# Altium PCB Расположение компонентов.PcbDoc
Units mm, origin at the board's own origin, x right, y up, seen from the top; angles counter-clockwise.
Board outline 152.4 x 101.6 mm, 2 copper layers (Top Layer, Bottom Layer); 8 components, 0 nets, 68 pads, 0 vias.
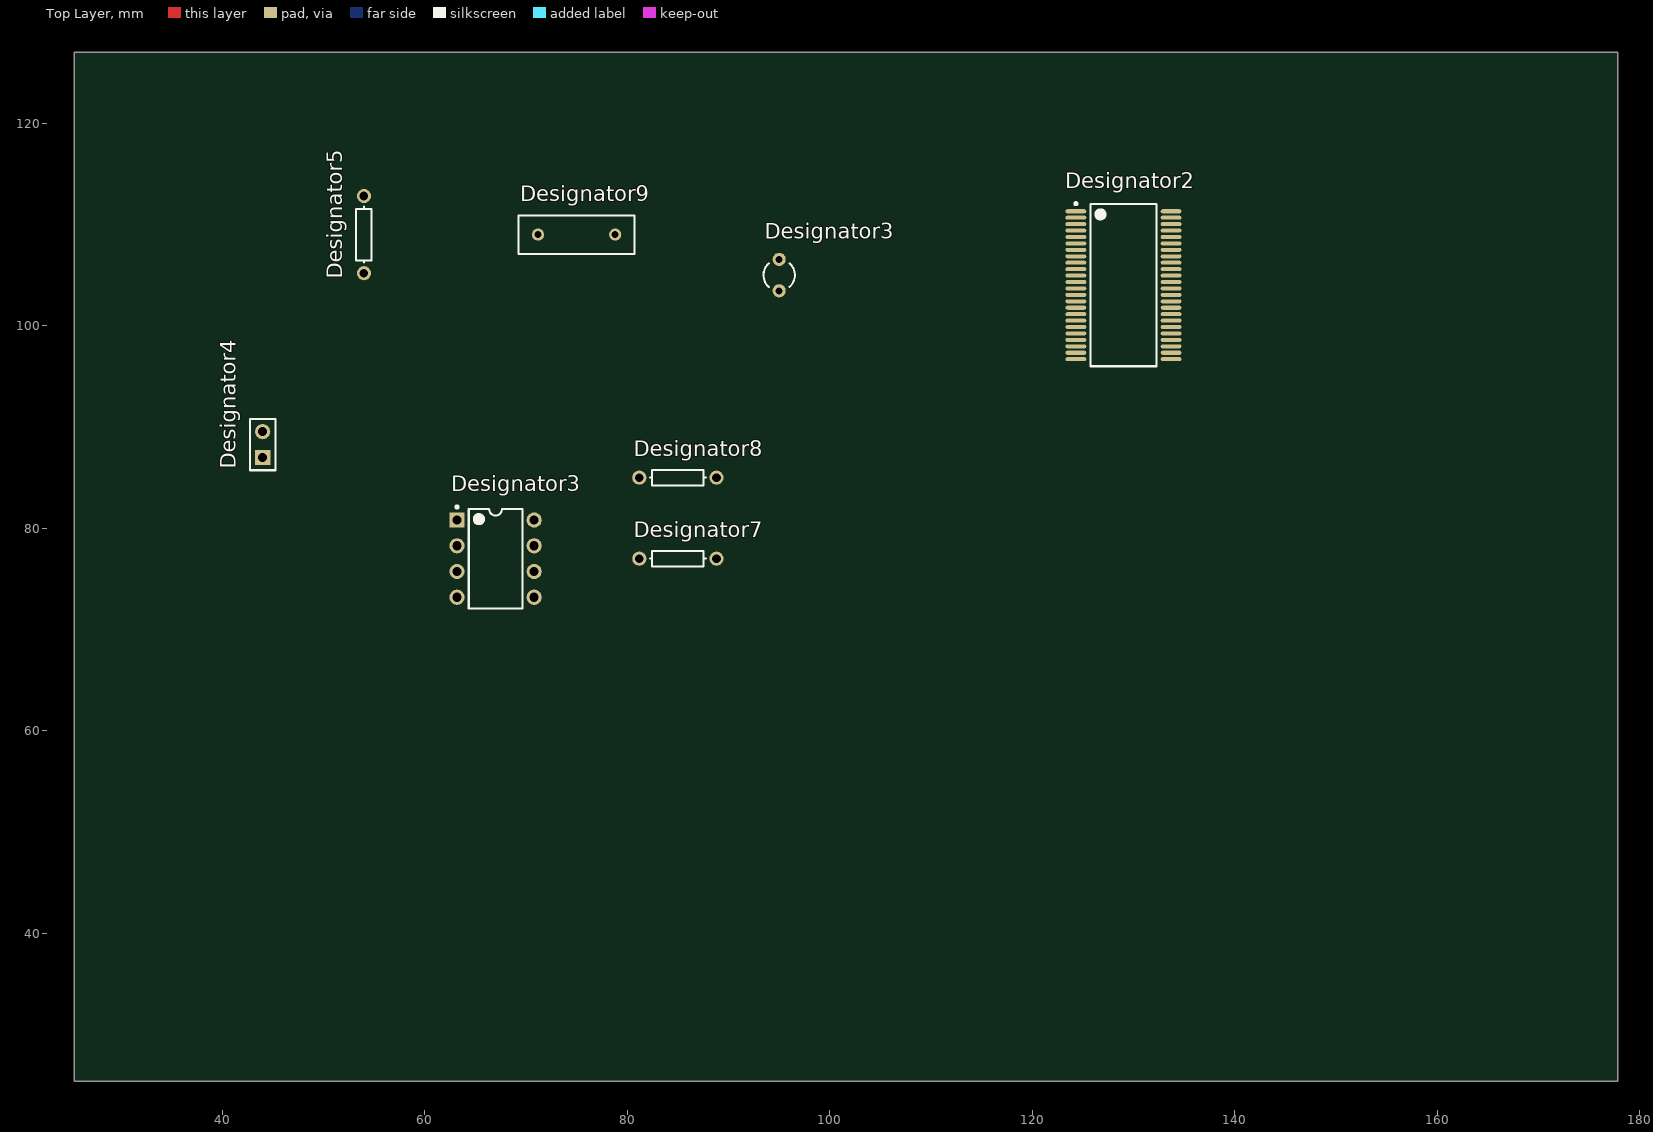
[diagram p0: Top Layer view]
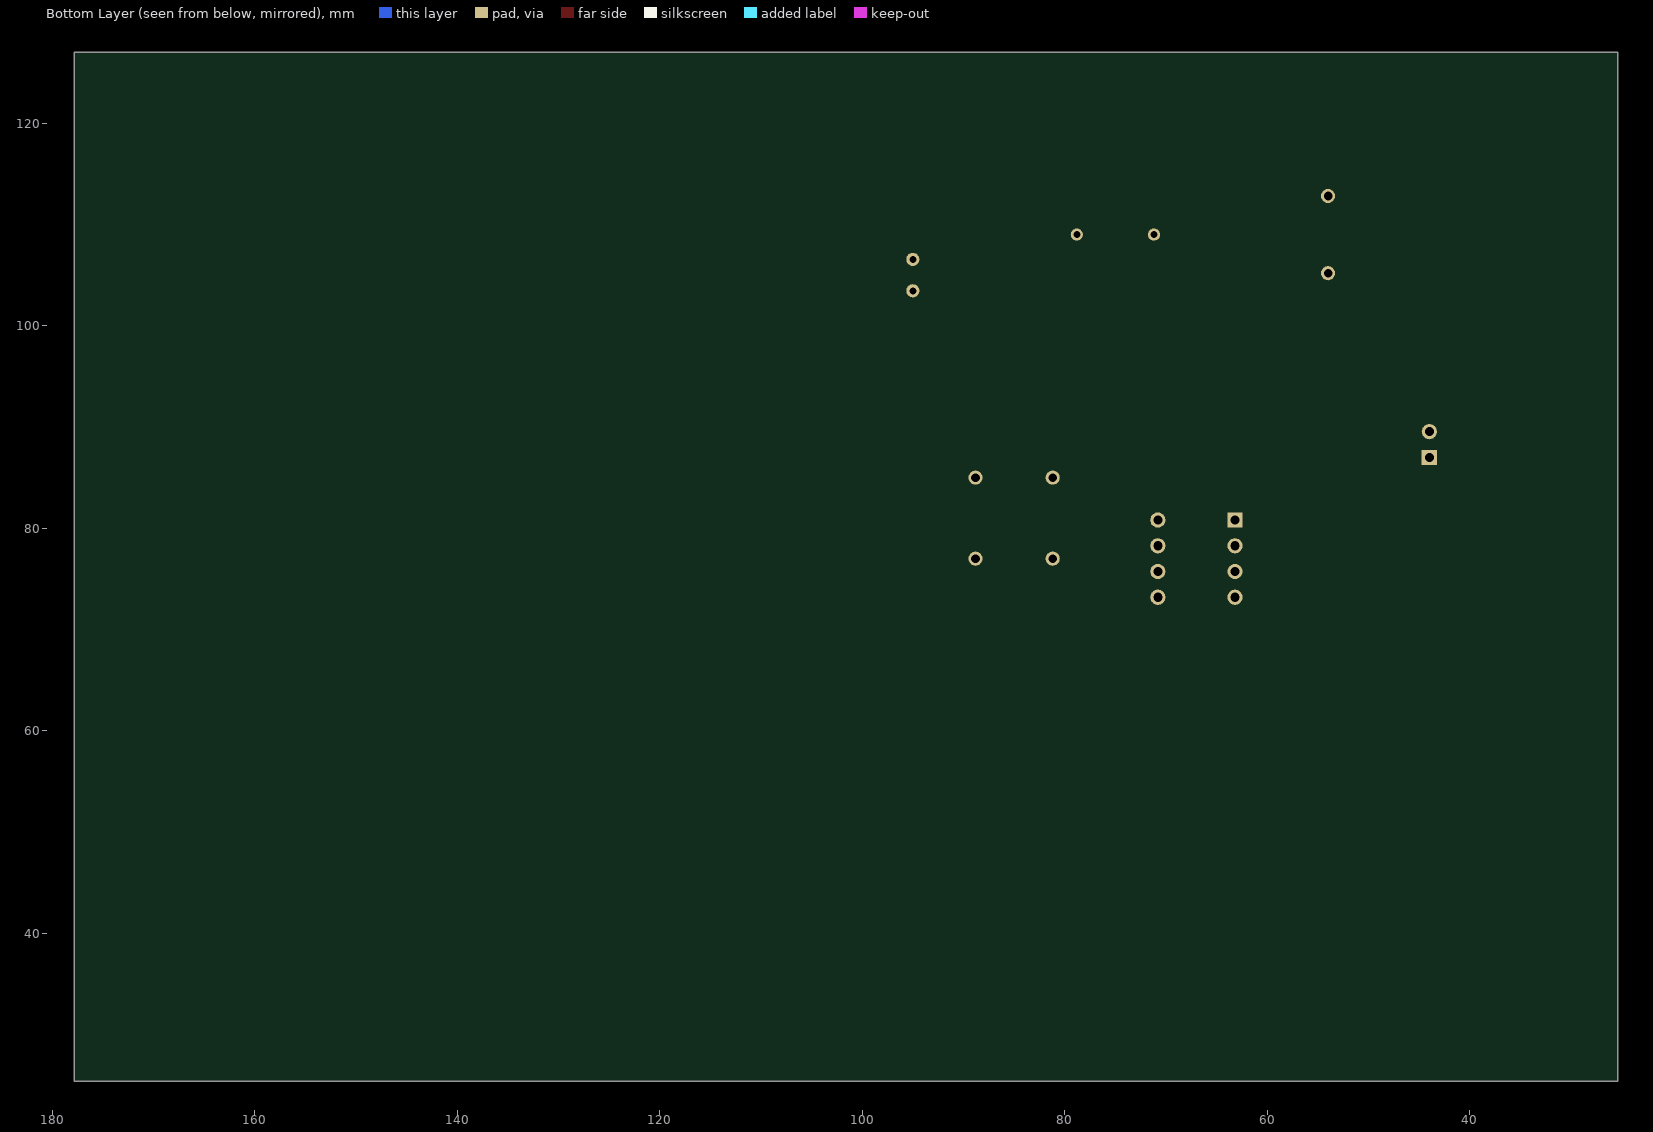
[diagram p1: Bottom Layer view, seen from below]

## Layer stack, top to bottom
Top Solder: solder mask 0.0102, Solder Resist, Dk 3.5
Top Layer: signal copper 0.0356
Dielectric 1: dielectric 0.32, FR-4, Dk 4.8
Bottom Layer: signal copper 0.0356
Bottom Solder: solder mask 0.0102, Solder Resist, Dk 3.5

## Board outline
25.4,25.4 177.8,25.4 177.8,127 25.4,127

## Design rules (kind name [scope] priority, off if disabled: settings)
Clearance [All] p1: gap=0.254 ignorepadtopadclearanceinfootprint=FALSE except(0: Arc-Hole Track-Hole SMDPad-Hole THPad-Hole Via-Hole Fill-Hole Poly-Hole Region-Hole Text-Hole)
PolygonConnect [All] p1: connectstyle=Relief reliefconductorwidth=0.254 reliefentries=4 polygonreliefangle="90 Angle" airgapwidth=0.254
RoutingVias [All] p1: holewidth=0.711 width=1.27 viastyle="Through Hole" minholewidth=0.711 minwidth=1.27 maxholewidth=0.711 maxwidth=1.27
SolderMaskExpansion [All] p1: expansion=0.102
Width [All] p1: maxlimit=0.254 minlimit=0.254 preferedwidth=0.254
30 further rules are at their usual default settings.

## Components (designator, comment, footprint, x,y, rotation, side; value= is the part's Value field where it differs from the comment)
Designator2 "Comment" CYP-PVX48_N 129,104 r0 top
Designator3 "Comment" R38 95,105 r0 top
Designator3 "Comment" PDIP300-P8 67,77 r0 top
Designator4 "Comment" HDR1X2 44,87 r90 top
Designator5 "Comment" AXIAL-0.3 54,109 r90 top
Designator7 "Comment" AXIAL-0.3 85,77 r0 top
Designator8 "Comment" AXIAL-0.3 85,85 r0 top
Designator9 "Comment" RAD-0.3 75,109 r0 top

## Footprints (in the part's own frame and the unit in brackets; to place one, negate y for a bottom-side part, rotate by r counter-clockwise, add the part's x,y. Pads: shape width x height; smd on the part's side, far side on the other; paste and mask are expansions set on the pad)
AXIAL-0.3 [mm] "Axial Device, Thru-Hole; 2 Leads; 0.3 in Pin Spacing"
  round 1.4 hole 0.85: 1(-3.81,0) 2(3.81,0)
  silkscreen extent -2.77,-0.76 2.77,0.76
CYP-PVX48_N [mm] "SOP, 48-Leads, Body 15.88x7.51mm, Pitch 0.635mm, IPC Medium Density"
  oval 2.05x0.4 smd: 1(-4.7,7.302) 2(-4.7,6.667) 3(-4.7,6.032) 4(-4.7,5.397) 5(-4.7,4.763) 6(-4.7,4.127) 7(-4.7,3.492) 8(-4.7,2.857) 9(-4.7,2.222) 10(-4.7,1.587) 11(-4.7,0.953) 12(-4.7,0.318) 13(-4.7,-0.318) 14(-4.7,-0.953) 15(-4.7,-1.587) 16(-4.7,-2.222) 17(-4.7,-2.857) 18(-4.7,-3.492) 19(-4.7,-4.127) 20(-4.7,-4.763) 21(-4.7,-5.397) 22(-4.7,-6.032) 23(-4.7,-6.667) 24(-4.7,-7.302) 25(4.7,-7.302) 26(4.7,-6.667) 27(4.7,-6.032) 28(4.7,-5.397) 29(4.7,-4.763) 30(4.7,-4.127) 31(4.7,-3.492) 32(4.7,-2.857) 33(4.7,-2.222) 34(4.7,-1.587) 35(4.7,-0.953) 36(4.7,-0.318) 37(4.7,0.318) 38(4.7,0.953) 39(4.7,1.587) 40(4.7,2.222) 41(4.7,2.857) 42(4.7,3.492) 43(4.7,4.127) 44(4.7,4.763) 45(4.7,5.397) 46(4.7,6.032) 47(4.7,6.667) 48(4.7,7.302)
  silkscreen extent -4.82,-8 3.27,8.18, body extent -3.8,-8 3.8,8, height 2.8
HDR1X2 [mm] "Connector; Header; 2 Position"
  rect 1.5x1.5 hole 0.9: 1(0,0)
  round 1.5 hole 0.9: 2(2.54,0)
  silkscreen extent -1.27,-1.27 3.81,1.27
PDIP300-P8 [mm] "DIP, 8-Leads, Row Spacing 7.62mm, Pitch 2.54mm, Body 9.5x6.6mm"
  rect 1.5x1.5 hole 0.9: 1(-3.81,3.81)
  round 1.5 hole 0.9: 2(-3.81,1.27) 3(-3.81,-1.27) 4(-3.81,-3.81) 5(3.81,-3.81) 6(3.81,-1.27) 7(3.81,1.27) 8(3.81,3.81)
  silkscreen extent -3.93,-4.9 2.65,5.23, body extent -3.55,-4.9 3.55,4.9, height 4.32
R38 [mm] "Crystal, Thru-Hole; 2 Leads; Body 3.1 x 8.2 mm (Dia.xH)"
  round 1.3 hole 0.7: 1(0,1.55) 2(0,-1.55)
  silkscreen extent -1.55,-1.19 1.55,1.17
RAD-0.3 [mm] "Radial Cap, Thru-Hole; 2 Leads; 0.3 in Pin Spacing"
  round 1.2 hole 0.7: 1(-3.81,0) 2(3.81,0)
  silkscreen extent -5.71,-1.91 5.71,1.91

## Nets (pads, with @x,y where several pads share a name; then routed paths per layer and width w, separated by ;. In a path a pad name is that pad's centre, name@x,y a point inside that pad or via, vN(x,y) a via of type N, cw(c..) or ccw(c..) an arc to the next point about the centre after c; other vN are vias at no path point)
pads on no net: Designator2.1 Designator2.2 Designator2.3 Designator2.4 Designator2.5 Designator2.6 Designator2.7 Designator2.8 Designator2.9 Designator2.10 Designator2.11 Designator2.12 Designator2.13 Designator2.14 Designator2.15 Designator2.16 Designator2.17 Designator2.18 Designator2.19 Designator2.20 Designator2.21 Designator2.22 Designator2.23 Designator2.24 Designator2.25 Designator2.26 Designator2.27 Designator2.28 Designator2.29 Designator2.30 Designator2.31 Designator2.32 Designator2.33 Designator2.34 Designator2.35 Designator2.36 Designator2.37 Designator2.38 Designator2.39 Designator2.40 Designator2.41 Designator2.42 Designator2.43 Designator2.44 Designator2.45 Designator2.46 Designator2.47 Designator2.48 Designator3.1 Designator3.2 Designator3.3 Designator3.4 Designator3.5 Designator3.6 Designator3.7 Designator3.8 Designator4.1 Designator4.2 Designator5.1 Designator5.2 Designator7.1 Designator7.2 Designator8.1 Designator8.2 Designator9.1 Designator9.2